# Altium PCB 基于51单片机超声波测距系统.PcbDoc
Units mm, origin at the board's own origin, x right, y up, seen from the top; angles counter-clockwise.
Board outline 152.4 x 101.6 mm, 2 copper layers (Top Layer, Bottom Layer); 26 components, 34 nets, 132 pads, 0 vias.
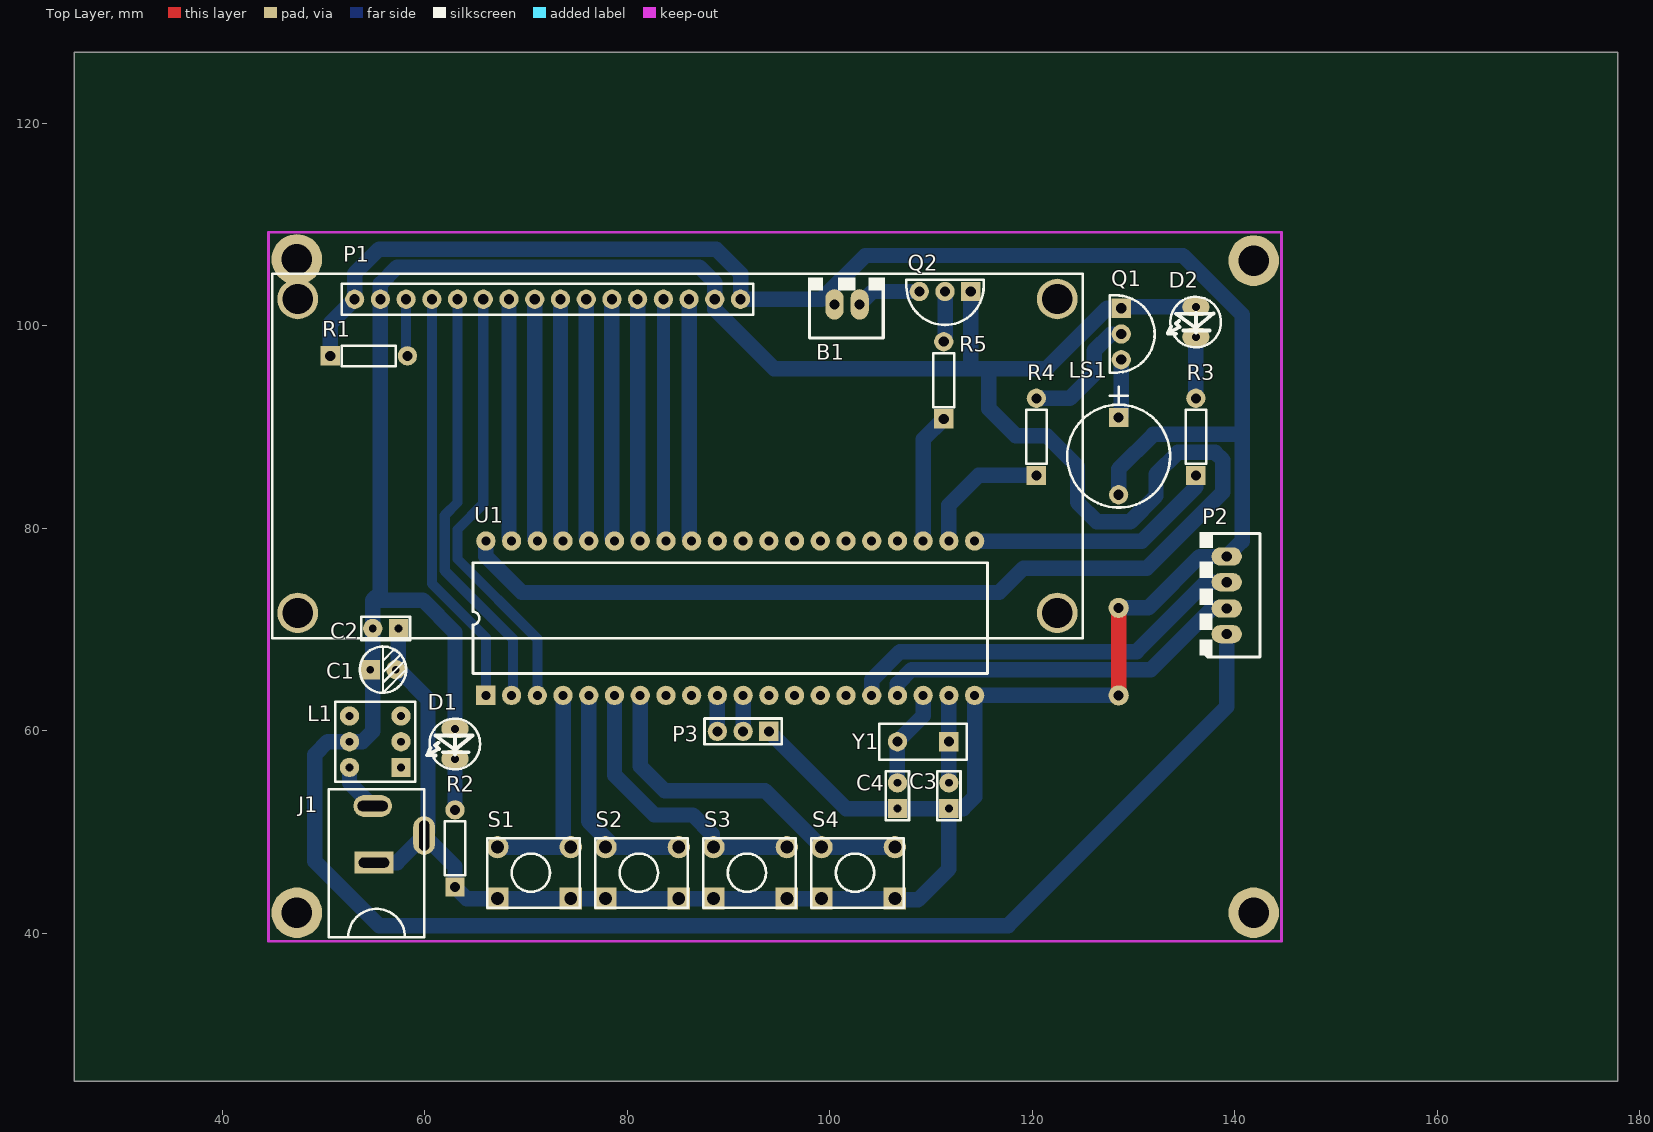
[diagram p0: Top Layer view]
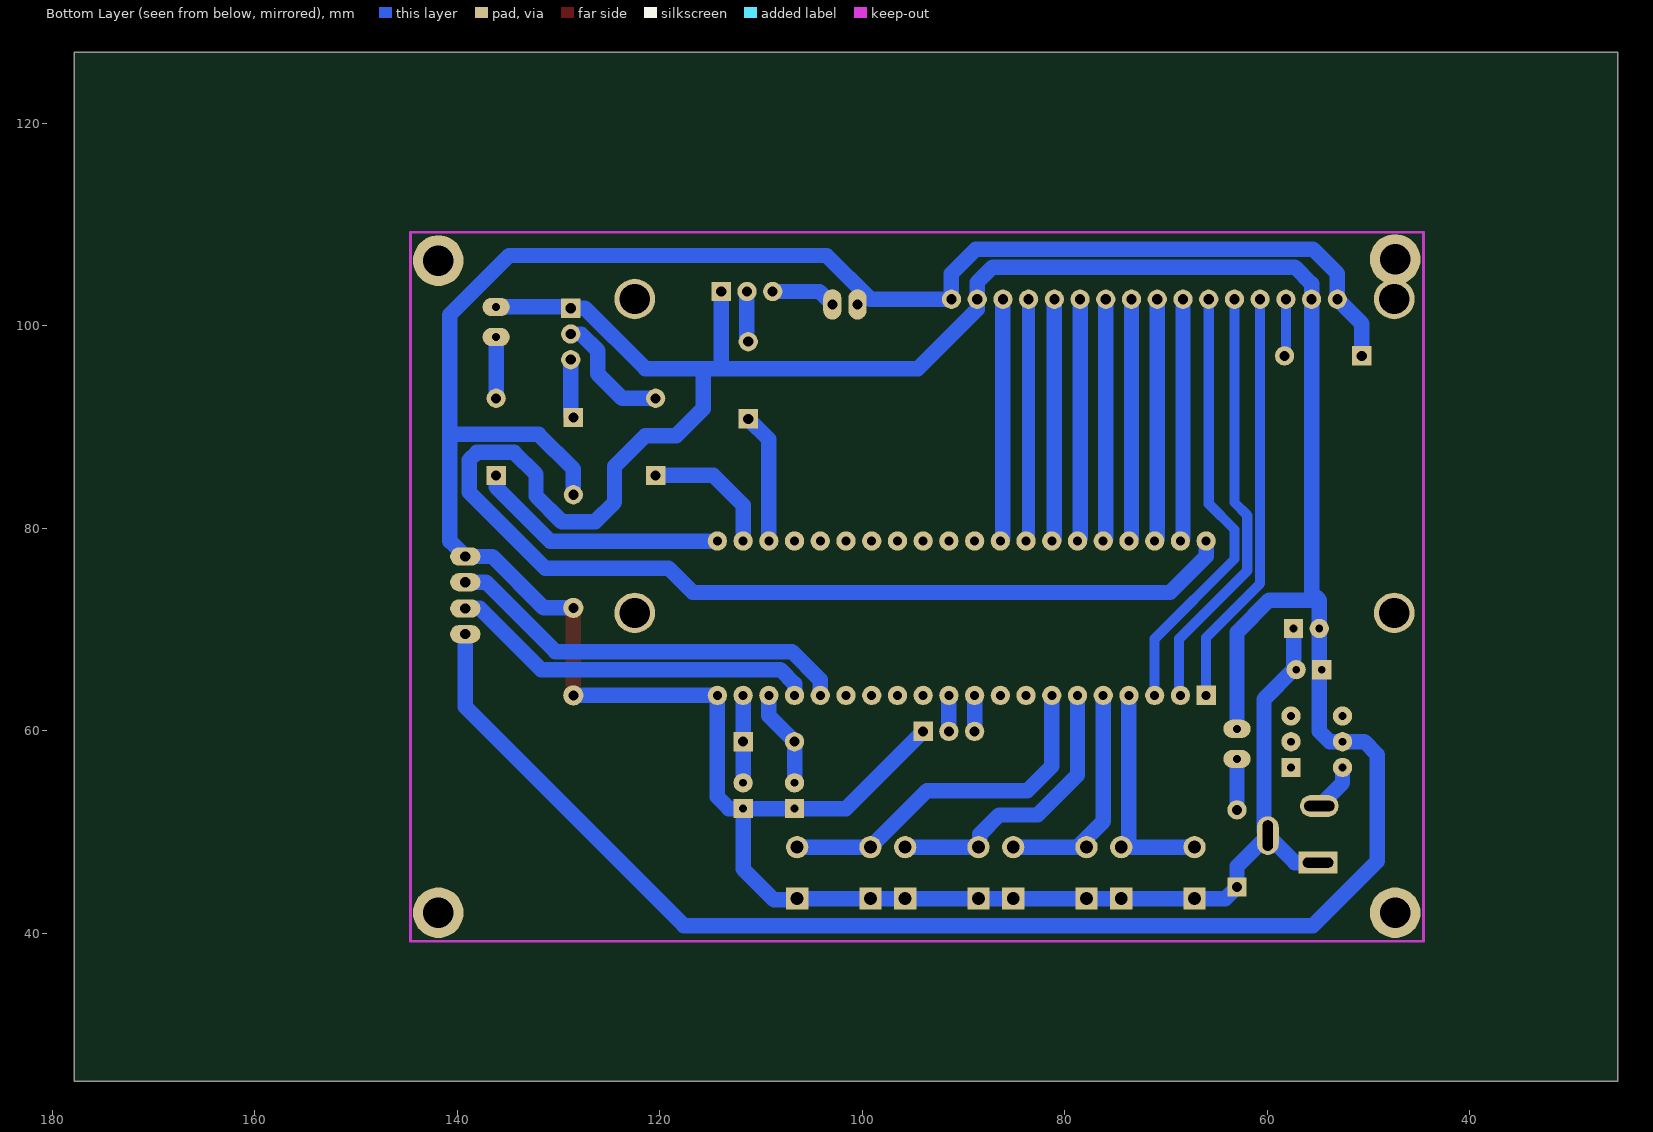
[diagram p1: Bottom Layer view, seen from below]

## Layer stack, top to bottom
Top Layer: signal copper 0.0356
Dielectric: dielectric 0.32, FR-4, Dk 4.8
Bottom Layer: signal copper 0.0356

## Board outline
25.4,25.4 177.8,25.4 177.8,127 25.4,127

## Design rules (kind name [scope] priority, off if disabled: settings)
Clearance [All] p1: gap=0.254
FabricationTestPointUsage TestPointUsage [All] p1: valid=0 allowmultiple=FALSE
FabricationTestpoint Testpoint [All] p1: side=3 testpointundercomponent=TRUE minsize=1.016 maxsize=2.54 preferedsize=1.524 minholesize=0 maxholesize=1.016 preferedholesize=0.813 testpointgrid=0.025 allowsidetop=TRUE allowsidebottom=TRUE usegrid=TRUE gridtolerance=0
PolygonConnect [All] p1: connectstyle=Relief reliefconductorwidth=0.254 reliefentries=4 polygonreliefangle="90 Angle"
RoutingVias [All] p1: holewidth=0.711 width=1.27 viastyle="Through Hole" minholewidth=0.711 minwidth=1.27 maxholewidth=0.711 maxwidth=1.27
SilkscreenOverComponentPads [All] p1: minsilkscreentomaskgap=0.254
SolderMaskExpansion [All] p1: expansion=0.102
Width [All] p1: maxlimit=2.54 minlimit=0.254 preferedwidth=0.254
25 further rules are at their usual default settings.

## Components (designator, comment, footprint, x,y, rotation, side; value= is the part's Value field where it differs from the comment)
B1 "Motor" 2p座 100.584,102.108 r0 top
C1 "47uF" 电解电容 55.88,66.04 r0 top
C2 "104" 瓷片电容 54.864,70.104 r180 top
C3 "22pF" 瓷片电容 111.76,54.864 r90 top
C4 "22pF" 瓷片电容 106.68,54.864 r90 top
D1 "LED" 发光二极管 62.992,58.928 r0 top
D2 "LED" 发光二极管 136.144,100.584 r0 top
J1 "PWR2.5" 电源接头 52.324,44.704 r90 top
L1 "电源开关" 开关 55.372,58.928 r180 top
LS1 "Speaker" 蜂鸣器 128.524,90.932 r270 top
P1 "1602" LCD1602液晶 77.724,82.296 r0 top
P2 "Header 4" 4P座 139.192,77.216 r270 top
P3 "程序下载接口" 下载器 93.98,59.944 r180 top
Q1 "8550" 三极管 129.032,101.6 r0 top
Q2 "8550" 三极管 113.792,103.124 r270 top
R1 "3K" 电阻 54.356,97.028 r90 top
R2 "10K" 电阻 62.992,48.26 r180 top
R3 "1K" 电阻 136.144,88.9 r180 top
R4 "100" 电阻 120.396,88.9 r180 top
R5 "100" 电阻 111.252,94.488 r180 top
S1 "" 按键 70.485,46.101 r90 top
S2 "" 按键 81.153,46.101 r90 top
S3 "" 按键 91.821,46.101 r90 top
S4 "" 按键 102.489,46.101 r90 top
U1 "STC89C51" 51单片机 66.04,63.5 r90 top
Y1 "11.0592MHz" 晶振 109.22,58.928 r270 top

## Footprints (in the part's own frame and the unit in brackets; to place one, negate y for a bottom-side part, rotate by r counter-clockwise, add the part's x,y. Pads: shape width x height; smd on the part's side, far side on the other; paste and mask are expansions set on the pad)
2p座 [mil]
  oval 71x118 hole 39.37: 1(93,0) 2(-5,0)
  silkscreen extent -108,-130 191,105
4P座 [mil]
  oval 71x118 hole 39.37: 1(0,0) 2(100,0) 3(202,0) 4(302,0)
  silkscreen extent -96,-106 390,130
51单片机 [mil]
  rect 75x75 hole 35: 1(0,0)
  round 75 hole 35: 2(0,-100) 3(0,-200) 4(0,-300) 5(0,-400) 6(0,-500) 7(0,-600) 8(0,-700) 9(0,-800) 10(0,-900) 11(0,-1000) 12(0,-1100) 13(0,-1200) 14(0,-1300) 15(0,-1400) 16(0,-1500) 17(0,-1600) 18(0,-1700) 19(0,-1800) 20(0,-1900) 21(600,-1900) 22(600,-1800) 23(600,-1700) 24(600,-1600) 25(600,-1500) 26(600,-1400) 27(600,-1300) 28(600,-1200) 29(600,-1100) 30(600,-1000) 31(600,-900) 32(600,-800) 33(600,-700) 34(600,-600) 35(600,-500) 36(600,-400) 37(600,-300) 38(600,-200) 39(600,-100) 40(600,0)
  silkscreen extent 85,-1950 515,50
LCD1602液晶 [mm]
  round 4 hole 3: 0(-30.266,-10.656) 0(-30.266,20.344) 0(44.734,-10.656) 0(44.734,20.344)
  round 1.905 hole 1: 1(-24.638,20.32) 2(-22.098,20.32) 3(-19.558,20.32) 4(-17.018,20.32) 5(-14.478,20.32) 6(-11.938,20.32) 7(-9.398,20.32) 8(-6.858,20.32) 9(-4.318,20.32) 10(-1.778,20.32) 11(0.762,20.32) 12(3.302,20.32) 13(5.842,20.32) 14(8.382,20.32) 15(10.922,20.32) 16(13.462,20.32)
  silkscreen extent -32.77,-13.16 47.23,22.84
三极管 [mil]
  rect 75x75 hole 39: 1(-10,5)
  round 75 hole 39: 2(-10,-95) 3(-10,-195)
  silkscreen extent -55,-245 120,55
下载器 [mil]
  rect 75x75 hole 39: 1(0,0)
  round 75 hole 39: 2(100,0) 3(200,0)
  silkscreen extent -50,-50 250,50
发光二极管 [mil]
  oval 106x71 hole 31.5: 1(0,50) 2(0,-67)
  silkscreen extent -108,-107 98,89
开关 [mil]
  rect 75x75 hole 30: 1(-90,100)
  round 75 hole 30: 2(110,100) 3(-90,0) 4(110,0) 5(-90,-100) 6(110,-100)
  silkscreen extent -145,-155 165,155
按键 [mm]
  rect 2.2x2.2 hole 1.27: 1(-2.667,3.302) 1(-2.667,-3.937)
  round 2.2 hole 1.27: 2(2.413,3.302) 2(2.413,-3.937)
  silkscreen extent -3.56,-4.83 3.3,4.32
晶振 [mil]
  rect 75x75 hole 39: 1(0,100)
  round 75 hole 39: 2(0,-100)
  silkscreen extent -70,-170 70,170
瓷片电容 [mil]
  rect 75x75 hole 30: 1(-100,0)
  round 75 hole 30: 2(0,0)
  silkscreen extent -145,-45 45,45
电源接头 [mil]
  oval 85x150 hole 39.37 slot 118.11 at 90 deg: 1(310,-100)
  rect 85x150 hole 39.37 slot 118.11 at 90 deg: 2(90,-105)
  oval 150x85 hole 39.37 slot 118.11 at 0 deg: 2(195,-300)
  silkscreen extent -200,-300 375,70
电解电容 [mil]
  rect 75x75 hole 30: 1(-50,0)
  round 75 hole 30: 2(50,0)
  silkscreen extent -90,-90 90,90
电阻 [mil]
  rect 75x75 hole 39: 1(0,145)
  round 75 hole 39: 2(0,-155)
  silkscreen extent -40,-110 40,100
蜂鸣器 [mil]
  rect 75x75 hole 39: 1(0,0)
  round 75 hole 39: 2(300,0)
  silkscreen extent -120,-200 350,200

## Part data
B1: "Motor, General Kind"
C1: library part "Cap Pol1", "Polarized Capacitor (Radial)"
C2 C3 C4: library part Cap, "Capacitor"
D1 D2: library part LED0, "Typical INFRARED GaAs LED"
J1: "Low Voltage Power Supply Connector"
L1: library part Liujiao
LS1: "Loudspeaker"
P2: "Header, 4-Pin"
P3: library part "Header 3", "Header, 3-Pin"
Q1 Q2: library part 2N3906, "PNP General Purpose Amplifier"
R1 R2 R3 R4 R5: library part Res2, "Resistor"
S1 S2 S3 S4: library part SW-PB, "Switch"
U1: library part STC89C52
Y1: library part XTAL, "Crystal Oscillator"

## Free pads (board coordinates)
  round 5 hole 3: 0(47.371,42.037) 1(47.371,106.553) 2(141.859,106.426) 3(141.859,42.037)
  round 2 hole 1: 0(128.524,72.136) 1(128.524,63.5)

## Nets (pads, with @x,y where several pads share a name; then routed paths per layer and width w, separated by ;. In a path a pad name is that pad's centre, name@x,y a point inside that pad or via, vN(x,y) a via of type N, cw(c..) or ccw(c..) an arc to the next point about the centre after c; other vN are vias at no path point)
ECHO: P2.2 U1.16 | length 40.6
  Bottom Layer w1.524: U1.16 104.14,65.024 106.934,67.818 130.302,67.818 137.16,74.676 P2.2
GND: B1.2 C1.2 C2.1 C3.1 C4.1 J1.2 LS1.2 P1.1 P1.16 P2.1 P3.1 pad.0@128.524,72.136 pad.1@128.524,63.5 R1.1 R2.1 S1.1 S2.1 S3.1 S4.1 U1.20 | length 306.8
  Top Layer w1.524: pad.1@128.524,63.5 pad.0@128.524,72.136
  Bottom Layer w1.524: R1.1 50.673,100.203 P1.1 53.086,105.156 55.499,107.569 88.773,107.569 91.186,105.156 P1.16 99.187,102.616 103.505,106.934 134.874,106.934 140.716,101.092 140.716,89.281 ; J1.2@54.991,46.99 57.277,46.99 J1.2@59.944,49.657 ; C2.1 57.404,66.04 60.325,63.119 60.325,50.038 J1.2@59.944,49.657 ; P3.1 101.6,52.324 C4.1 C3.1 ; S4.1@106.045,43.307 108.712,43.307 111.76,46.355 C3.1 ; S4.1@106.426,43.434 99.187,43.434 95.758,43.434 88.519,43.434 85.09,43.434 77.851,43.434 74.422,43.434 67.183,43.434 64.135,43.434 R2.1 62.992,46.609 J1.2@59.944,49.657 ; pad.1@128.524,63.5 U1.20 114.3,53.467 113.157,52.324 C3.1 ; pad.0@128.524,72.136 131.445,72.136 136.525,77.216 P2.1 140.716,78.74 140.716,89.281 ; LS1.2 128.524,85.852 131.953,89.281 140.716,89.281
NetB1_1: B1.1 Q2.3 | length 6.4
  Bottom Layer w1.524: B1.1 104.216,103.378 Q2.3
NetD1_2: D1.2 R2.2 | length 5
  Bottom Layer w1.524: R2.2 D1.2
NetD2_2: D2.2 R3.2 | length 6
  Bottom Layer w1.524: R3.2 D2.2
NetJ1_1: J1.1 L1.2 | length 4.8
  Bottom Layer w1.5: L1.2 52.578,54.864 J1.1
NetLS1_1: LS1.1 Q1.3 | length 5.8
  Bottom Layer w1.524: LS1.1 128.778,91.186 Q1.3
NetP1_3: P1.3 R1.2 | length 5.6
  Bottom Layer w1: P1.3 58.166,97.155 R1.2
NetQ1_2: Q1.2 R4.2 | length 12.4
  Bottom Layer w1.524: R4.2 123.698,92.837 126.111,95.25 126.111,97.536 127.762,99.187 Q1.2
NetQ2_2: Q2.2 R5.2 | length 5
  Bottom Layer w1.524: R5.2 111.379,98.552 Q2.2
P00: P1.7 U1.39 | length 24
  Bottom Layer w1.524: P1.7 68.326,78.994 U1.39
P01: P1.8 U1.38 | length 24
  Bottom Layer w1.524: P1.8 70.866,78.994 U1.38
P02: P1.9 U1.37 | length 24
  Bottom Layer w1.524: P1.9 73.406,78.994 U1.37
P03: P1.10 U1.36 | length 24
  Bottom Layer w1.524: P1.10 75.946,78.994 U1.36
P04: P1.11 U1.35 | length 24
  Bottom Layer w1.524: P1.11 78.486,78.994 U1.35
P05: P1.12 U1.34 | length 24
  Bottom Layer w1.524: P1.12 81.026,78.994 U1.34
P06: P1.13 U1.33 | length 24
  Bottom Layer w1.27: P1.13 83.566,78.994 U1.33
P07: P1.14 U1.32 | length 24
  Bottom Layer w1.524: P1.14 86.106,78.994 U1.32
P10: P1.4 U1.1 | length 41.3
  Bottom Layer w1: P1.4 60.706,74.549 66.04,69.215 U1.1
P11: P1.5 U1.2 | length 42.5
  Bottom Layer w1: P1.5 63.246,82.55 61.976,81.28 61.976,75.819 68.707,69.088 68.707,63.627 U1.2
P12: P1.6 U1.3 | length 43.4
  Bottom Layer w1: P1.6 65.786,82.423 63.246,79.883 63.246,76.962 71.12,69.088 U1.3
P13: S1.2 U1.4 | length 21.5
  Bottom Layer w1.524: S1.2@67.183,48.514 73.66,48.514 U1.4
P14: S2.2 U1.5 | length 22.4
  Bottom Layer w1.524: U1.5 76.2,51.054 78.74,48.514 S2.2@85.09,48.514
P15: S3.2 U1.6 | length 27.4
  Bottom Layer w1.524: U1.6 78.74,55.626 82.677,51.689 86.487,51.689 88.392,49.784 S3.2@88.392,48.641 ; S3.2@89.408,48.514 S3.2@95.758,48.514
P16: S4.2 U1.7 | length 34.6
  Bottom Layer w1.524: U1.7 81.28,56.515 83.693,54.102 93.599,54.102 S4.2@99.187,48.514 ; S4.2@100.076,48.514 S4.2@106.426,48.514
P20: R3.1 U1.21 | length 25.2
  Bottom Layer w1.524: U1.21 130.81,78.74 136.144,84.074 R3.1
P21: R4.1 U1.22 | length 13.4
  Bottom Layer w1.524: U1.22 111.76,82.296 114.681,85.217 R4.1
P22: R5.1 U1.23 | length 12.9
  Bottom Layer w1.524: U1.23 109.22,88.773 R5.1
RX: P3.3 U1.10 | length 3.6
  Bottom Layer w1.524: P3.3 U1.10
TRIG: P2.3 U1.17 | length 36.7
  Bottom Layer w1.524: U1.17 106.68,64.643 108.077,66.04 131.699,66.04 137.744,72.085 P2.3
TX: P3.2 U1.11 | length 3.6
  Bottom Layer w1.524: P3.2 U1.11
VCC: C1.1 C2.2 D1.1 D2.1 L1.4 P1.2 P1.15 P2.4 Q1.1 Q2.1 U1.40 | length 407.9
  Bottom Layer w1.524: D1.1 62.992,69.723 59.817,72.898 54.864,72.898 ; U1.40 66.04,77.216 69.596,73.66 116.713,73.66 119.126,76.073 131.318,76.073 138.811,83.566 138.811,86.741 138.049,87.503 134.366,87.503 132.207,85.344 132.207,83.185 129.667,80.645 126.365,80.645 124.46,82.55 124.46,86.106 121.412,89.154 118.364,89.154 115.697,91.821 115.697,95.758 ; Q2.1 113.919,96.012 113.665,95.758 ; D2.1 128.905,101.854 Q1.1 127.381,101.727 121.412,95.758 115.697,95.758 ; P2.4 139.192,62.357 117.602,40.767 55.499,40.767 49.149,47.117 49.149,57.658 50.419,58.928 L1.4 53.848,58.928 54.864,59.944 C2.2 54.864,72.898 ; 54.864,72.898 55.626,73.66 P1.2 55.626,104.14 57.277,105.791 87.122,105.791 88.646,104.267 P1.15 88.646,101.6 94.488,95.758 113.665,95.758 ; 113.665,95.758 115.697,95.758
X1: C3.2 U1.19 Y1.1 | length 8.6
  Bottom Layer w1.524: C3.2 Y1.1 U1.19
X2: C4.2 U1.18 Y1.2 | length 9.7
  Bottom Layer w1.524: C4.2 Y1.2 109.22,61.468 U1.18
pads on no net: L1.1 L1.3 L1.5 L1.6 P1.0 U1.8 U1.9 U1.12 U1.13 U1.14 U1.15 U1.24 U1.25 U1.26 U1.27 U1.28 U1.29 U1.30 U1.31

## Keep-outs
Keep-Out Layer:
  lines w0.254: 144.577,39.243 44.577,39.243 44.577,109.22 144.602,109.22 144.602,39.243